# Altium PCB PCB1.PcbDoc
Units mm, origin at the board's own origin, x right, y up, seen from the top; angles counter-clockwise.
Board outline 152.4 x 101.6 mm, 2 copper layers (Top Layer, Bottom Layer); 4 components, 8 nets, 46 pads, 0 vias.
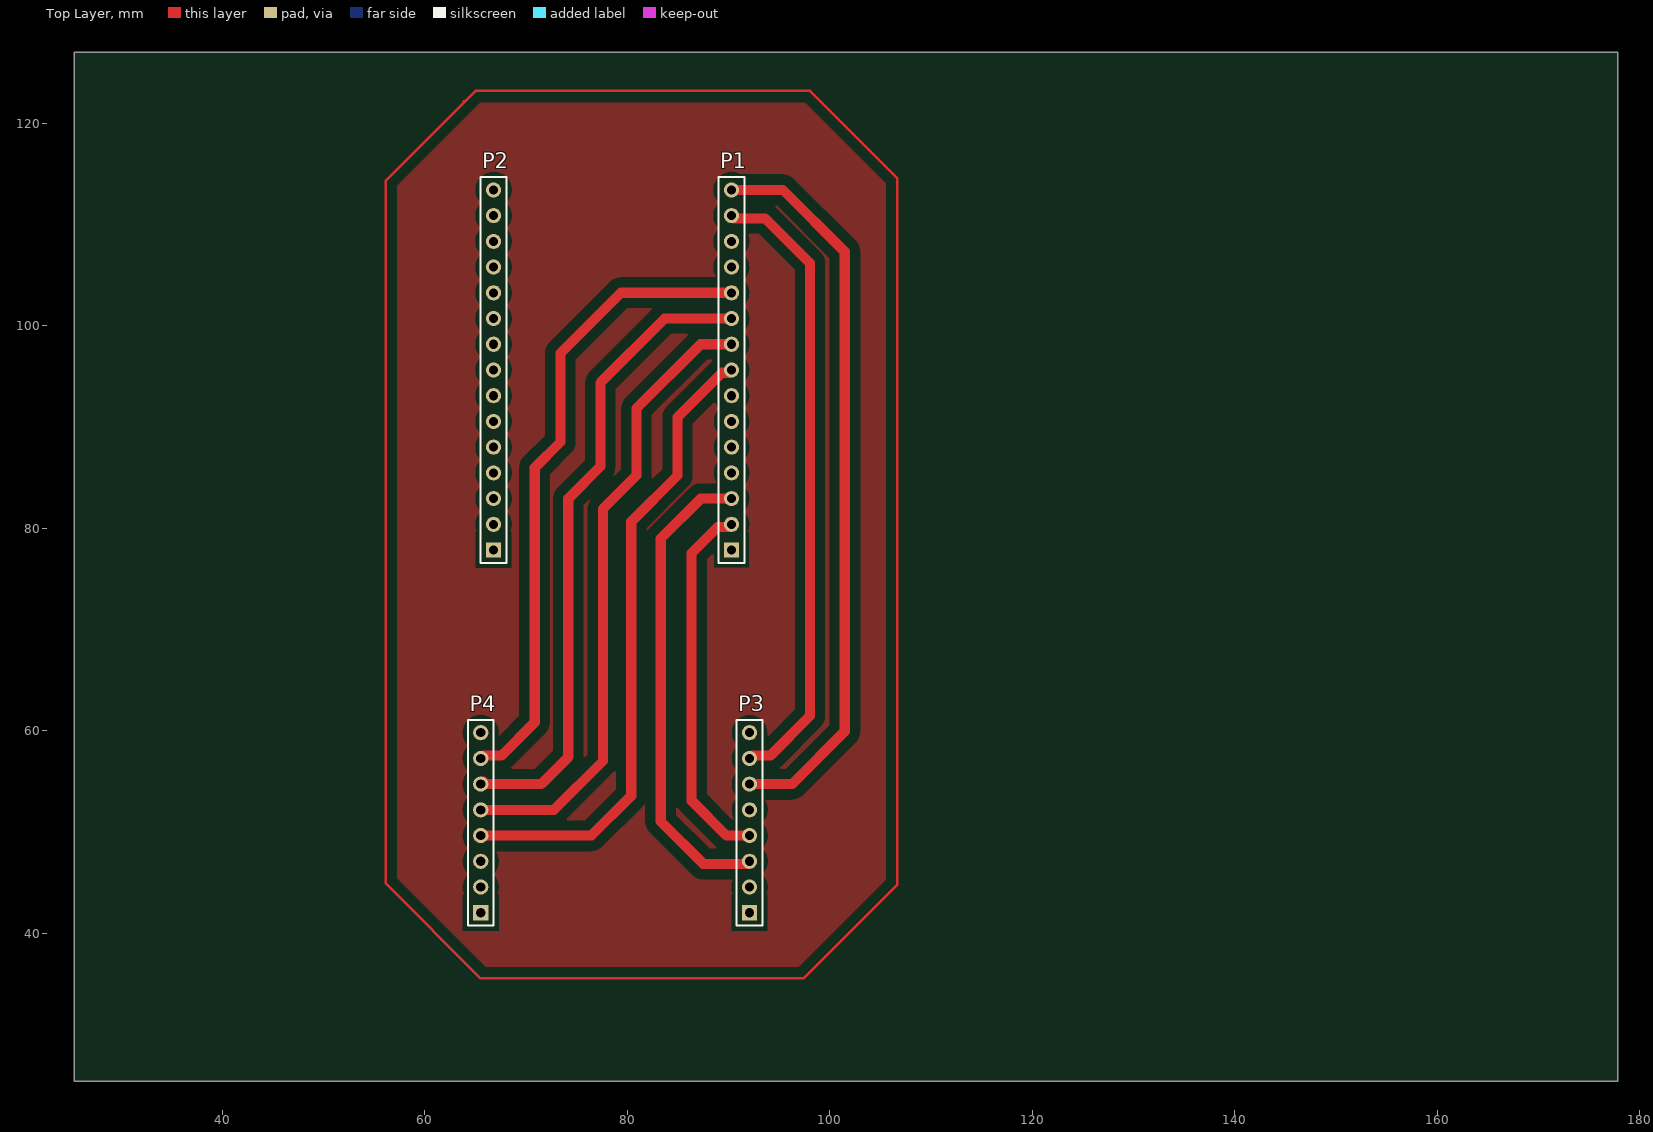
[diagram p0: Top Layer view]
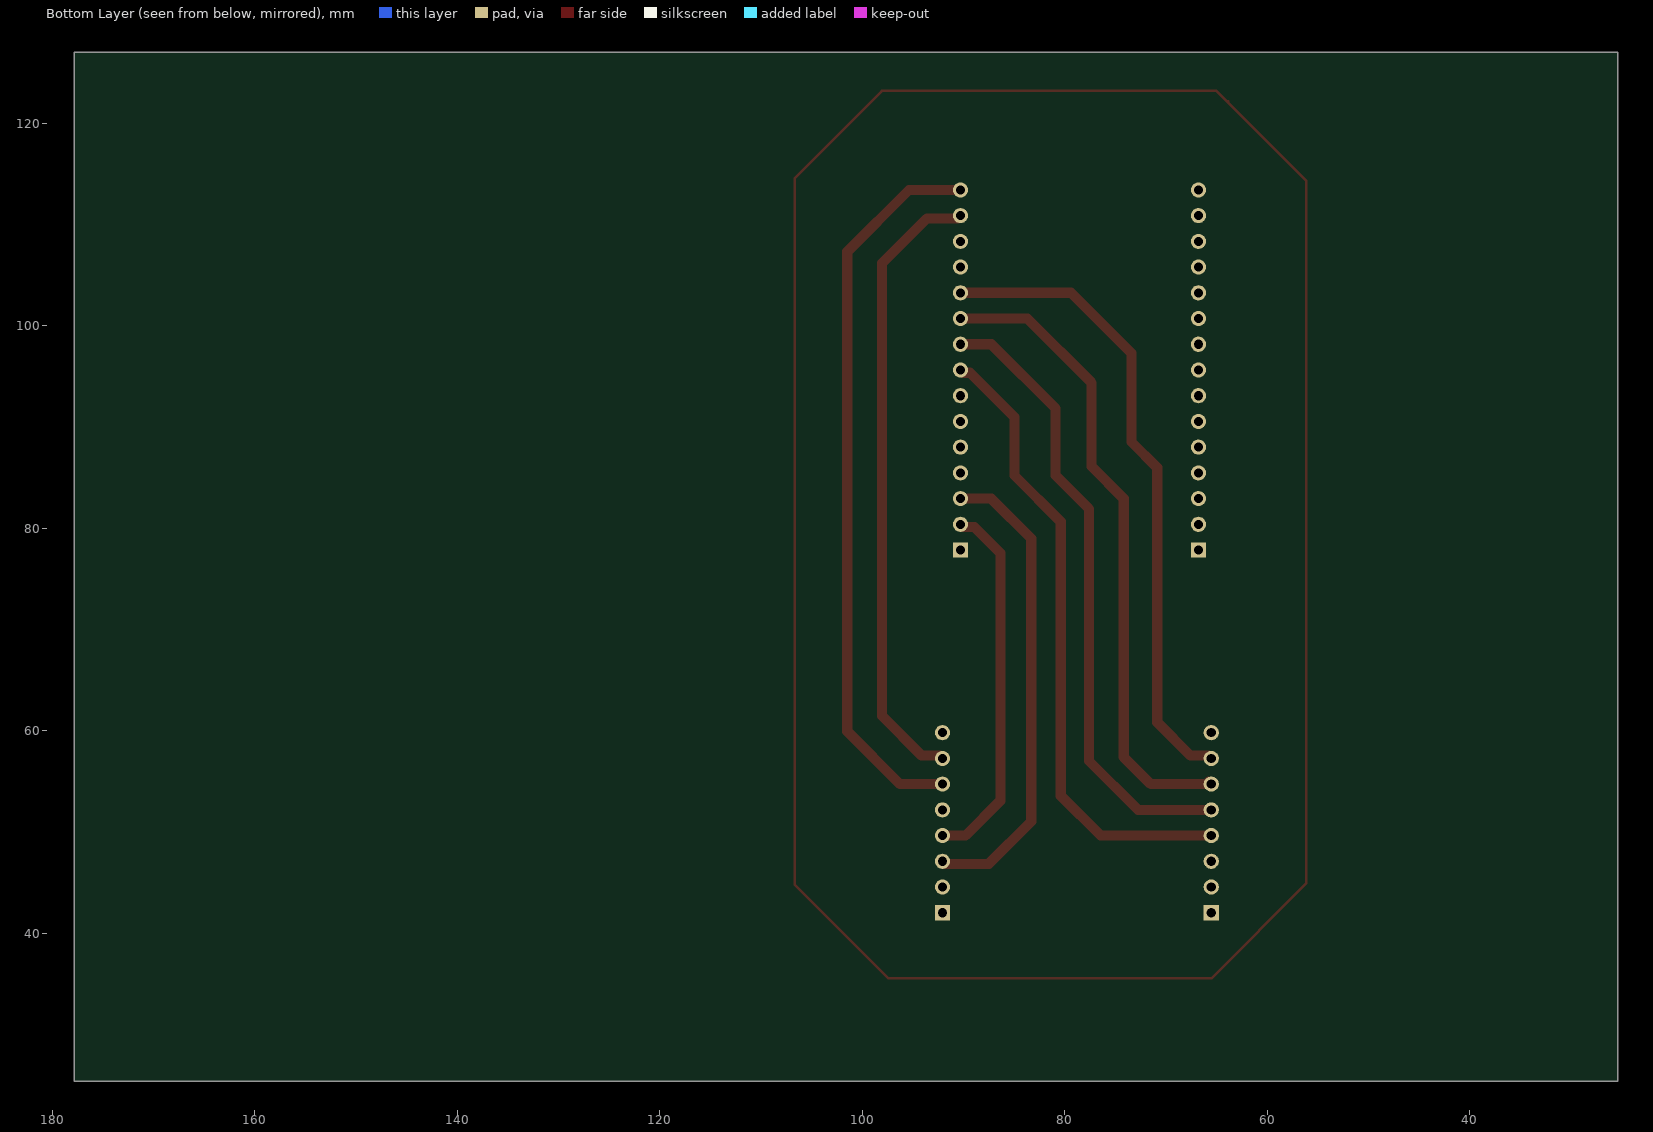
[diagram p1: Bottom Layer view, seen from below]

## Layer stack, top to bottom
Top Solder: solder mask 0.0102, Solder Resist, Dk 3.5
Top Layer: signal copper 0.0356
Dielectric 1: dielectric 0.32, FR-4, Dk 4.8
Bottom Layer: signal copper 0.0356
Bottom Solder: solder mask 0.0102, Solder Resist, Dk 3.5

## Board outline
25.4,25.4 177.8,25.4 177.8,127 25.4,127

## Design rules (kind name [scope] priority, off if disabled: settings)
Clearance [All] p1: gap=1.016 ignorepadtopadclearanceinfootprint=FALSE
PolygonConnect [All] p1: connectstyle=Relief reliefconductorwidth=0.254 reliefentries=4 polygonreliefangle="90 Angle" airgapwidth=0.254
RoutingVias [All] p1: holewidth=0.711 width=1.27 viastyle="Through Hole" minholewidth=0.711 minwidth=1.27 maxholewidth=0.711 maxwidth=1.27
SolderMaskExpansion [All] p1: expansion=0.102
Width [All] p1: maxlimit=2 minlimit=0.5 preferedwidth=1
30 further rules are at their usual default settings.

## Components (designator, comment, footprint, x,y, rotation, side; value= is the part's Value field where it differs from the comment)
P1 "Header 15" HDR1X15 90.297,77.851 r90 top
P2 "Header 15" HDR1X15 66.802,77.851 r90 top
P3 "Header 8" HDR1X8 92.075,42.037 r90 top
P4 "Header 8" HDR1X8 65.532,42.037 r90 top

## Footprints (in the part's own frame and the unit in brackets; to place one, negate y for a bottom-side part, rotate by r counter-clockwise, add the part's x,y. Pads: shape width x height; smd on the part's side, far side on the other; paste and mask are expansions set on the pad)
HDR1X8 [mm] "Connector; Header; 8 Position"
  rect 1.5x1.5 hole 0.9: 1(0,0)
  round 1.5 hole 0.9: 2(2.54,0) 3(5.08,0) 4(7.62,0) 5(10.16,0) 6(12.7,0) 7(15.24,0) 8(17.78,0)
  silkscreen extent -1.27,-1.27 19.05,1.27
HDR1X15 [mm] "Connector; Header; 15 Position"
  rect 1.5x1.5 hole 0.9: 1(0,0)
  round 1.5 hole 0.9: 2(2.54,0) 3(5.08,0) 4(7.62,0) 5(10.16,0) 6(12.7,0) 7(15.24,0) 8(17.78,0) 9(20.32,0) 10(22.86,0) 11(25.4,0) 12(27.94,0) 13(30.48,0) 14(33.02,0) 15(35.56,0)
  silkscreen extent -1.27,-1.27 36.83,1.27

## Part data
P1 P2: "Header, 15-Pin", LatestRevisionDate=17-Jul-2002, LatestRevisionNote="Re-released for DXP Platform.", Publisher="Altium Limited"
P3 P4: "Header, 8-Pin", LatestRevisionDate=17-Jul-2002, LatestRevisionNote="Re-released for DXP Platform.", Publisher="Altium Limited"

## Nets (pads, with @x,y where several pads share a name; then routed paths per layer and width w, separated by ;. In a path a pad name is that pad's centre, name@x,y a point inside that pad or via, vN(x,y) a via of type N, cw(c..) or ccw(c..) an arc to the next point about the centre after c; other vN are vias at no path point)
3v3: P1.15 P3.6 | length 72.6
  Top Layer w1: P1.15 95.377,113.411 101.473,107.315 101.473,59.944 96.266,54.737 P3.6
D1: P1.2 P3.4 | length 36.7
  Top Layer w1: P1.2 90.023,80.117 88.919,80.117 86.36,77.558 86.36,53.086 89.789,49.657 P3.4
D2: P1.3 P3.3 | length 47.2
  Top Layer w1: P1.3 87.249,82.931 83.312,78.994 83.312,51.054 87.503,46.863 91.821,46.863 P3.3
D5: P1.8 P4.4 | length 63
  Top Layer w1: P4.4 76.454,49.657 80.391,53.594 80.391,80.645 84.963,85.217 84.963,90.962 89.358,95.357 90.023,95.357 P1.8
D6: P1.9 P4.5 | length 62.4
  Top Layer w1: P4.5@65.659,52.324 P4.5 72.771,52.197 77.597,57.023 77.597,81.915 80.899,85.217 80.899,91.821 87.249,98.171 P1.9
D7: P1.10 P4.6 | length 64
  Top Layer w1: P4.6@65.806,55.011 P4.6 71.501,54.737 74.168,57.404 74.168,82.931 77.343,86.106 77.343,94.361 83.693,100.711 P1.10
D8: P1.11 P4.7 | length 63.8
  Top Layer w1: P4.7 65.806,57.551 67.574,57.551 70.866,60.843 70.866,85.979 73.406,88.519 73.406,97.282 79.375,103.251 P1.11 P1.11@90.424,103.124
GND: P1.14 P3.7 | length 62.1
  Top Layer w1: P1.14 90.571,110.597 93.619,110.597 98.044,106.172 98.044,61.478 94.117,57.551 92.349,57.551 P3.7
pads on no net: P1.1 P1.4 P1.5 P1.6 P1.7 P1.12 P1.13 P2.1 P2.2 P2.3 P2.4 P2.5 P2.6 P2.7 P2.8 P2.9 P2.10 P2.11 P2.12 P2.13 P2.14 P2.15 P3.1 P3.2 P3.5 P3.8 P4.1 P4.2 P4.3 P4.8
copper on no net: | length 258
  Top Layer w0.254: 61.976,120.142 65.024,123.19 98.044,123.19 106.68,114.554 106.68,44.831 97.409,35.56 65.532,35.56 56.134,44.958 56.134,114.3 63.881,122.047 63.881,122.174

## Polygon pours and split planes (outlines as drawn)
no net on Top Layer (solid, pour order 18): 117.094,91.313
no net on Top Layer (solid, pour order 16): 112.649,101.473
no net on Top Layer (solid, pour order 14): 65.024,123.19 56.134,114.3 56.134,44.958 65.405,35.687 97.282,35.687 97.409,35.56 106.68,44.831 106.68,114.173 98.044,122.809 98.044,123.19